# Altium PCB PMP30825_RevA.PcbDoc (part 2 of 3)
Units mil, origin at the board's own origin, x right, y up, seen from the top; angles counter-clockwise.
Board outline 3750 x 1750 mil, 2 copper layers (Top Layer, Bottom Layer), stack 62 mil thick; 85 components, 40 nets, 187 pads, 24 vias.
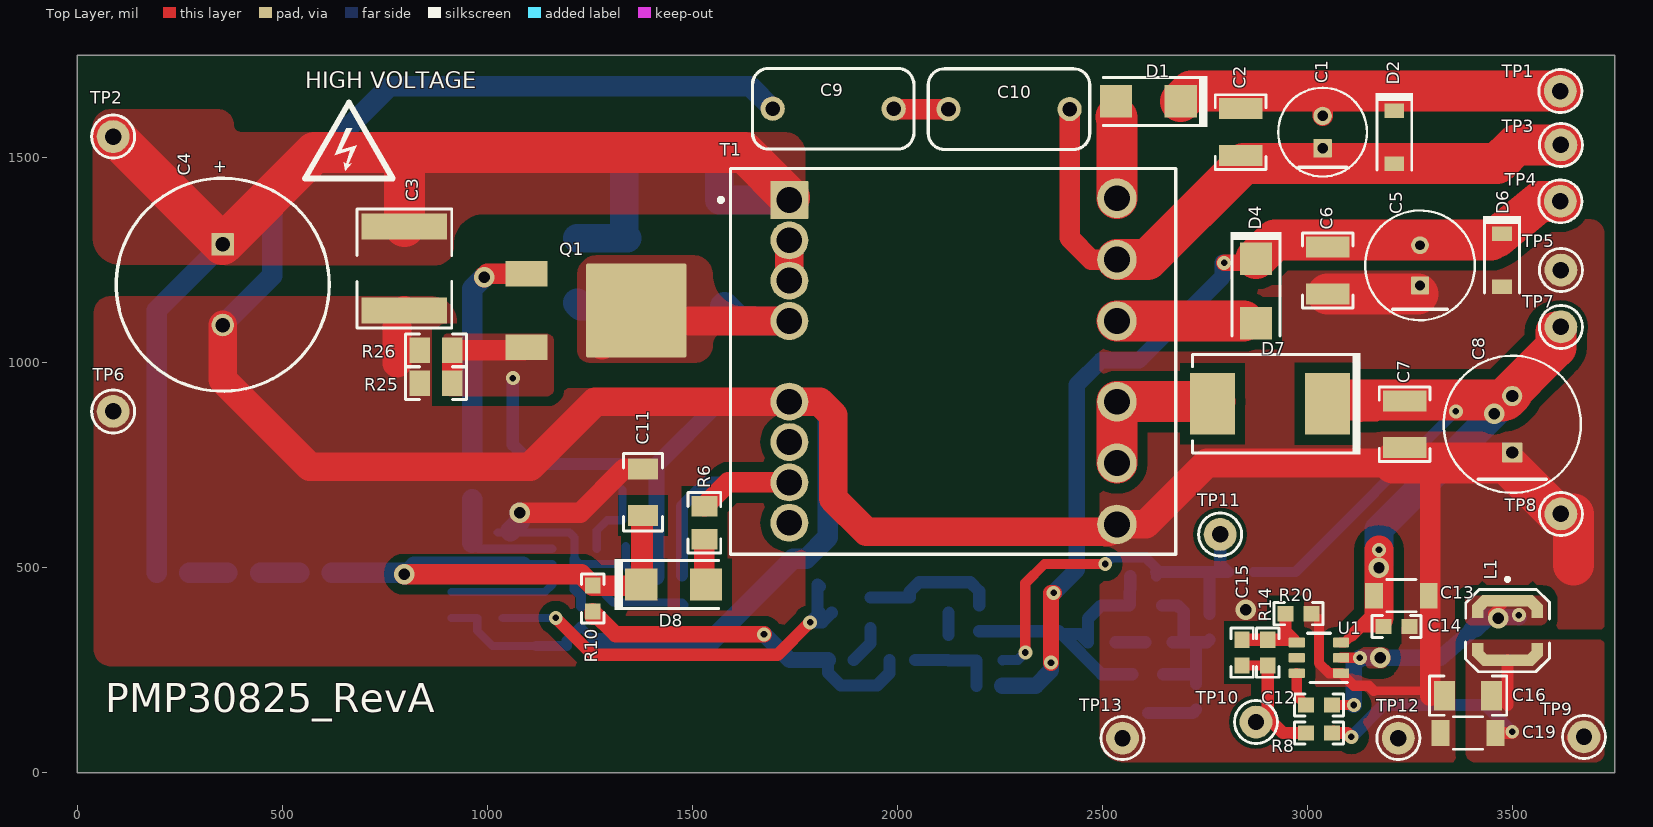
[diagram p0: Top Layer view]

## Part data (continued)
R18: "RES, 169 k, 1%, 0.1 W, 0603", Manufacturer=Vishay-Dale, Power_W=0.1, Supplier Part Number 1=541-169KHCT-ND, TempCo="100 ppm/C", Tolerance_%=1, Value1=1%, Value2=0.1W, Value_Code=169k, AEC Category=Q200, AEC Qualified=?, ComponentLink1Description="Datasheet link", ComponentLink1URL=http://www.vishay.com/docs/20035/dcrcwe3.pdf, CompType=Resistor, EIA_Code=E96, Green_EU RoHS="Passed with Exemption", Green_EU RoHS-2=Passed, Green_Lifecycle=Active, Green_REACh=Passed, LatestRevisionDate=2017-06-13, MountType=SMT, PackageReference=0603, PartNumber=CRCW0603169KFKEA, Published=2008-06-26, Publisher="Texas Instruments", Res_ohm=169000, RoHS=Y, SizeArea_mm2=1.28, SizeX_mm=1.6, SizeY_mm=0.8, SizeZ_mm=1, Supplier 1=Digi-Key, Supplier 2=Newark, Supplier 3=Mouser, Supplier Part Number 2=52K8184, Supplier Part Number 3=71-CRCW0603-169K-E3, SymbolVersion=2009-05-29, Technology="Thick Film", U/M=EA, ValueDisplayed=169k, VDC_V=75
R19: "RES, 0, 5%, 0.125 W, 0805", Manufacturer=Vishay-Dale, Power_W=0.125, Supplier Part Number 1=541-0.0ACT-ND, TempCo="200 ppm/C", Tolerance_%=5, Value1=5%, Value2=0.125W, Value_Code=0000, ValueDisplayed=0, AEC Category=Q200, AEC Qualified=?, ComponentLink1Description="Datasheet link", ComponentLink1URL=http://www.vishay.com/docs/20035/dcrcwe3.pdf, CompType=Resistor, EIA_Code=E24, LatestRevisionDate=2016-08-02, MountType=SMT, PackageReference=0805, PartNumber=CRCW08050000Z0EA, Published=2008-06-26, Publisher="Texas Instruments", Res_ohm=0, RoHS=Y, SizeArea_mm2=2.5, SizeX_mm=2, SizeY_mm=1.25, SizeZ_mm=1.45, Supplier 1=Digi-Key, Supplier 2=Mouser, Supplier 3=Farnell, Supplier Part Number 2=71-CRCW0805-0-E3, Supplier Part Number 3=1469846, SymbolVersion=2009-05-29, Technology="Thick Film", U/M=EA, VDC_V=150
R20: "RES, 13.7 k, 1%, 0.1 W, 0603", Manufacturer=Vishay-Dale, Power_W=0.1, Supplier Part Number 1=541-13.7KHCT-ND, TempCo="100 ppm/C", Tolerance_%=1, Value1=1%, Value2=0.1W, Value_Code=13k7, ValueDisplayed=13.7k, AEC Category=Q200, AEC Qualified=?, ComponentLink1Description="Datasheet link", ComponentLink1URL=http://www.vishay.com/docs/20035/dcrcwe3.pdf, CompType=Resistor, EIA_Code=E96, Green_EU RoHS="Passed with Exemption", Green_EU RoHS-2=Passed, Green_Lifecycle=Active, Green_REACh=Passed, LatestRevisionDate=2017-06-13, MountType=SMT, PackageReference=0603, PartNumber=CRCW060313K7FKEA, Published=2008-06-26, Publisher="Texas Instruments", Res_ohm=13700, RoHS=Y, SizeArea_mm2=1.28, SizeX_mm=1.6, SizeY_mm=0.8, SizeZ_mm=1, Supplier 1=Digi-Key, Supplier 2=Newark, Supplier 3=Mouser, Supplier Part Number 2=42K3706, Supplier Part Number 3=71-CRCW0603-13.7K-E3, SymbolVersion=2009-05-29, Technology="Thick Film", U/M=EA, VDC_V=75
R21: "RES, 22.6 k, 1%, 0.1 W, 0603", Manufacturer=Vishay-Dale, Power_W=0.1, Supplier Part Number 1=541-22.6KHCT-ND, TempCo="100 ppm/C", Tolerance_%=1, Value1=1%, Value2=0.1W, Value_Code=22k6, ValueDisplayed=22.6k, AEC Category=Q200, AEC Qualified=?, ComponentLink1Description="Datasheet link", ComponentLink1URL=http://www.vishay.com/docs/20035/dcrcwe3.pdf, CompType=Resistor, EIA_Code=E96, Green_EU RoHS="Passed with Exemption", Green_EU RoHS-2=Passed, Green_Lifecycle=Active, Green_REACh=Passed, LatestRevisionDate=2017-06-13, MountType=SMT, PackageReference=0603, PartNumber=CRCW060322K6FKEA, Published=2008-06-26, Publisher="Texas Instruments", Res_ohm=22600, RoHS=Y, SizeArea_mm2=1.28, SizeX_mm=1.6, SizeY_mm=0.8, SizeZ_mm=1, Supplier 1=Digi-Key, Supplier 2=Newark, Supplier 3=Mouser, Supplier Part Number 2=52K8290, Supplier Part Number 3=71-CRCW0603-22.6K-E3, SymbolVersion=2009-05-29, Technology="Thick Film", U/M=EA, VDC_V=75
R22: "RES, 1.54 k, 1%, 0.1 W, 0603", Manufacturer=Vishay-Dale, Power_W=0.1, Supplier Part Number 1=541-1.54KHCT-ND, TempCo="100 ppm/C", Tolerance_%=1, Value1=1%, Value2=0.1W, Value_Code=1k54, ValueDisplayed=1.54k, AEC Category=Q200, AEC Qualified=?, ComponentLink1Description="Datasheet link", ComponentLink1URL=http://www.vishay.com/docs/20035/dcrcwe3.pdf, CompType=Resistor, EIA_Code=E96, Green_EU RoHS="Passed with Exemption", Green_EU RoHS-2=Passed, Green_Lifecycle=Active, Green_REACh=Passed, LatestRevisionDate=2017-06-13, MountType=SMT, PackageReference=0603, PartNumber=CRCW06031K54FKEA, Published=2008-06-26, Publisher="Texas Instruments", Res_ohm=1540, RoHS=Y, SizeArea_mm2=1.28, SizeX_mm=1.6, SizeY_mm=0.8, SizeZ_mm=1, Supplier 1=Digi-Key, Supplier 2=Newark, Supplier 3=Mouser, Supplier Part Number 2=52K8038, Supplier Part Number 3=71-CRCW0603-1.54K-E3, SymbolVersion=2009-05-29, Technology="Thick Film", U/M=EA, VDC_V=75
R23: library part Resistor, "RES, xxx ohm, x%, xW, [PackageReference]", Alternate Manufacturer=-, Manufacturer="Used in BOM report", Alternate PartNumber=-, ComponentLink1Description="Datasheet Link", ComponentLink1URL="Paste URL for datasheet here", CompType=Resistor, LatestRevisionDate=2017-05-31, LatestRevisionNote="Added Alternate PartNumber and Alternate Manufacturer parameters to appropriate components.", MountType="SMT or TH (used in PnP report)", PackageReference="Used in PnP output and some BOM reports", PartNumber=DNP, Publisher="Texas Instruments", RoHS="Used in BOM report.  Use Y or N.", SymbolVersion=2009-05-29, U/M=EA
R24: "RES, 4.99 k, 1%, 0.1 W, 0603", Manufacturer=Vishay-Dale, Power_W=0.1, Supplier Part Number 1=541-4.99KHCT-ND, TempCo="100 ppm/C", Tolerance_%=1, Value1=1%, Value2=0.1W, Value_Code=4k99, ValueDisplayed=4.99k, AEC Category=Q200, AEC Qualified=?, ComponentLink1Description="Datasheet link", ComponentLink1URL=http://www.vishay.com/docs/20035/dcrcwe3.pdf, CompType=Resistor, EIA_Code=E96, Green_EU RoHS="Passed with Exemption", Green_EU RoHS-2=Passed, Green_Lifecycle=Active, Green_REACh=Passed, LatestRevisionDate=2017-06-13, MountType=SMT, PackageReference=0603, PartNumber=CRCW06034K99FKEA, Published=2008-06-26, Publisher="Texas Instruments", Res_ohm=4990, RoHS=Y, SizeArea_mm2=1.28, SizeX_mm=1.6, SizeY_mm=0.8, SizeZ_mm=1, Supplier 1=Digi-Key, Supplier 2=Newark, Supplier 3=Mouser, Supplier Part Number 2=52K8500, Supplier Part Number 3=71-CRCW0603-4.99K-E3, SymbolVersion=2009-05-29, Technology="Thick Film", U/M=EA, VDC_V=75
R25: "RES, 4.70, 1%, 0.125 W, 0805", Manufacturer=Panasonic, Power_W=0.125, Supplier Part Number 1=P4.7DCT-ND, TempCo="200 ppm/C", Tolerance_%=1, Value1=1%, Value2=0.125W, Value_Code=4R70, ValueDisplayed=4.70, AEC Category=Q200, AEC Qualified=?, ComponentLink1Description="Datasheet link", ComponentLink1URL=http://www.panasonic.com/industrial/components/pdf/AOA0000CE3.pdf, CompType=Resistor, Green_EU RoHS=Incomplete, Green_EU RoHS-2=Incomplete, Green_Lifecycle="Not Set", Green_REACh=Incomplete, LatestRevisionDate=2017-06-23, MountType=SMT, PackageReference=0805, PartNumber=ERJ-6RQF4R7V, Published=2008-06-26, Publisher="Texas Instruments", Res_ohm=4.7, RoHS=Y, SizeArea_mm2=2.5, SizeX_mm=2, SizeY_mm=1.25, SizeZ_mm=1.45, Supplier 1=Digi-Key, Supplier 2=Mouser, Supplier 3=Farnell, Supplier Part Number 2=667-ERJ-6RQF4R7V, Supplier Part Number 3=1892972, SymbolVersion=2009-05-29, Technology="Thick Film", U/M=EA
R26: "RES, 3.30, 1%, 0.125 W, 0805", Manufacturer=Panasonic, Power_W=0.125, Supplier Part Number 1=P3.3DCT-ND, TempCo="200 ppm/C", Tolerance_%=1, Value1=1%, Value2=0.125W, Value_Code=3R30, ValueDisplayed=3.30, AEC Category=Q200, AEC Qualified=?, ComponentLink1Description="Datasheet link", ComponentLink1URL=http://www.panasonic.com/industrial/components/pdf/AOA0000CE3.pdf, CompType=Resistor, LatestRevisionDate=2017-06-23, MountType=SMT, PackageReference=0805, PartNumber=ERJ-6RQF3R3V, Published=2008-06-26, Publisher="Texas Instruments", Res_ohm=3.3, RoHS=Y, SizeArea_mm2=2.5, SizeX_mm=2, SizeY_mm=1.25, SizeZ_mm=1.45, Supplier 1=Digi-Key, Supplier 2=Mouser, Supplier 3=Farnell, Supplier Part Number 2=667-ERJ-6RQF3R3V, Supplier Part Number 3=1717805, SymbolVersion=2009-05-29, Technology="Thick Film", U/M=EA
R27: "RES, 32.4 k, 1%, 0.1 W, 0603", Manufacturer=Vishay-Dale, Power_W=0.1, Supplier Part Number 1=541-32.4KHCT-ND, TempCo="100 ppm/C", Tolerance_%=1, Value1=1%, Value2=0.1W, Value_Code=32k4, ValueDisplayed=32.4k, AEC Category=Q200, AEC Qualified=?, ComponentLink1Description="Datasheet link", ComponentLink1URL=http://www.vishay.com/docs/20035/dcrcwe3.pdf, CompType=Resistor, EIA_Code=E96, Green_EU RoHS="Passed with Exemption", Green_EU RoHS-2=Passed, Green_Lifecycle=Active, Green_REACh=Passed, LatestRevisionDate=2017-06-13, MountType=SMT, PackageReference=0603, PartNumber=CRCW060332K4FKEA, Published=2008-06-26, Publisher="Texas Instruments", Res_ohm=32400, RoHS=Y, SizeArea_mm2=1.28, SizeX_mm=1.6, SizeY_mm=0.8, SizeZ_mm=1, Supplier 1=Digi-Key, Supplier 2=Newark, Supplier 3=Mouser, Supplier Part Number 2=52K8423, Supplier Part Number 3=71-CRCW0603-32.4K-E3, SymbolVersion=2009-05-29, Technology="Thick Film", U/M=EA, VDC_V=75
R28: "RES, 44.2 k, 1%, 0.1 W, 0603", Manufacturer=Vishay-Dale, Power_W=0.1, Supplier Part Number 1=541-44.2KHCT-ND, TempCo="100 ppm/C", Tolerance_%=1, Value1=1%, Value2=0.1W, Value_Code=44k2, ValueDisplayed=44.2k, AEC Category=Q200, AEC Qualified=?, ComponentLink1Description="Datasheet link", ComponentLink1URL=http://www.vishay.com/docs/20035/dcrcwe3.pdf, CompType=Resistor, EIA_Code=E96, Green_EU RoHS="Passed with Exemption", Green_EU RoHS-2=Passed, Green_Lifecycle=Active, Green_REACh=Passed, LatestRevisionDate=2017-06-13, MountType=SMT, PackageReference=0603, PartNumber=CRCW060344K2FKEA, Published=2008-06-26, Publisher="Texas Instruments", Res_ohm=44200, RoHS=Y, SizeArea_mm2=1.28, SizeX_mm=1.6, SizeY_mm=0.8, SizeZ_mm=1, Supplier 1=Digi-Key, Supplier 2=Newark, Supplier 3=Mouser, Supplier Part Number 2=52K8533, Supplier Part Number 3=71-CRCW0603-44.2K-E3, SymbolVersion=2009-05-29, Technology="Thick Film", U/M=EA, VDC_V=75
R30: "RES, 4.02 k, 1%, 0.1 W, 0603", Manufacturer=Vishay-Dale, Power_W=0.1, Supplier Part Number 1=541-4.02KHCT-ND, TempCo="100 ppm/C", Tolerance_%=1, Value1=1%, Value2=0.1W, Value_Code=4k02, ValueDisplayed=4.02k, AEC Category=Q200, AEC Qualified=?, ComponentLink1Description="Datasheet link", ComponentLink1URL=http://www.vishay.com/docs/20035/dcrcwe3.pdf, CompType=Resistor, EIA_Code=E96, Green_EU RoHS="Passed with Exemption", Green_EU RoHS-2=Passed, Green_Lifecycle=Active, Green_REACh=Passed, LatestRevisionDate=2017-06-13, MountType=SMT, PackageReference=0603, PartNumber=CRCW06034K02FKEA, Published=2008-06-26, Publisher="Texas Instruments", Res_ohm=4020, RoHS=Y, SizeArea_mm2=1.28, SizeX_mm=1.6, SizeY_mm=0.8, SizeZ_mm=1, Supplier 1=Digi-Key, Supplier 2=Newark, Supplier 3=Mouser, Supplier Part Number 2=52K8483, Supplier Part Number 3=71-CRCW0603-4.02K-E3, SymbolVersion=2009-05-29, Technology="Thick Film", U/M=EA, VDC_V=75
T1: library part CMP-0088528-1, "TRANSFORMER", Frequency_Fixed=80kHz, Manufacturer="Wurth Electronics", Operating Temperature Range="-40°C to +125°C", Voltage_Isolation_Vrms=3kV, AEC Qualified=No, Datasheet Path=datasheets/Trans-750319024r00.pdf, DCR_ohm=6.32, helpURL=https://upverter.com/upn/revision/be9802b5c4ace36f/, Ind_H=2mH, Lead Free=Yes, Ns1toNp=1:1/5.67:1/6.8:1/8.1:1/10:1, PackageReference=PTH_TRANSFORMER, Part Number=750319024r00, RoHS=TRUE, Rsec1_ohm=0.094, SizeZ_mm=25.2mm
TP1 TP2 TP4 TP7 TP9 TP10: "Test Point, Miniature, Red, TH", Color=Red, Manufacturer=Keystone, Supplier Part Number 1=36-5000-ND, ComponentLink1Description="Datasheet URL", ComponentLink1URL=http://www.keyelco.com/userAssets/file/M60-2p60.pdf, CompType="Test Point Loop", ContactFinish=Silver, Green_EU RoHS=Passed, Green_EU RoHS-2=Incomplete, Green_Lifecycle=Active, Green_REACh=Passed, LatestRevisionDate=2017-05-11, MountType=TH, PackageReference="Red Miniature Testpoint", PartNumber=5000, Publisher="Texas Instruments", RoHS=Y, Supplier 1=Digi-Key, Supplier 2=Mouser, Supplier Part Number 2=534-5000, SymbolVersion=2008-04-04
TP3 TP5 TP6 TP8 TP12: "Test Point, Miniature, Black, TH", Color=Black, Manufacturer=Keystone, Supplier Part Number 1=36-5001-ND, ComponentLink1Description="Datasheet URL", ComponentLink1URL=http://www.keyelco.com/userAssets/file/M60-2p60.pdf, CompType="Test Point Loop", ContactFinish=Silver, Green_EU RoHS=Passed, Green_EU RoHS-2=Incomplete, Green_Lifecycle=Active, Green_REACh=Passed, LatestRevisionDate=2017-05-11, MountType=TH, PackageReference="Black Miniature Testpoint", PartNumber=5001, Publisher="Texas Instruments", RoHS=Y, Supplier 1=Digi-Key, Supplier 2=Mouser, Supplier Part Number 2=534-5001, SymbolVersion=2008-04-04
TP11: "Test Point, Miniature, Red, TH", Manufacturer=Keystone, Supplier Part Number 1=5000K-ND, ComponentLink1Description="Datasheet Link", ComponentLink1URL=http://www.keyelco.com/userAssets/file/M60-2p60.pdf, CompType="Test Point Loop", LatestRevisionDate=2014-11-26, MountType=TH, PackageReference="Red Miniature Testpoint", PartNumber=5000, Publisher="Texas Instruments", RoHS=Y, Supplier 1=Digi-Key, SymbolVersion=2008-04-04, U/M=EA
TP13: "Test Point, Miniature, Black, TH", Manufacturer=Keystone, Supplier Part Number 1=5001K-ND, ComponentLink1Description="Datasheet Link", ComponentLink1URL=http://www.keyelco.com/userAssets/file/M60-2p60.pdf, CompType="Test Point Loop", LatestRevisionDate=2014-11-26, MountType=TH, PackageReference="Black Miniature Testpoint", PartNumber=5001, Publisher="Texas Instruments", RoHS=Y, Supplier 1=Digi-Key, SymbolVersion=2008-04-04, U/M=EA
U1: library part CMP-0073969-3, "4.5V to 28V Input, 2A Output, EMI Friendly Synchronous Step-Down Converter, DDC0006A (SOT-23-THIN-6)", Alternate Manufacturer="Texas Instruments", Alternate PartNumber=TPS54202DDCT, Operating Temperature Range="-40 to 125 C", Rating=Catalog, AEC Category=Q200, AEC Qualified=N, ComponentLink1Description="Datasheet Link", ComponentLink1URL=http://www.ti.com/lit/ds/symlink/tps54202.pdf, ComponentLink2Description="Product Folder", ComponentLink2URL=http://www.ti.com/product/tps54202, ComponentLink3Description="Online Datasheet", ComponentLink3URL=http://www.ti.com/product/tps54202/datasheet, CompType=IC, Manufacturer="Texas Instruments", MountType=SMT, PackageDescription=SOT-23-THIN-6, PackageReference=DDC0006A, PartNumber=TPS54202DDCR, RoHS=Y, SizeArea_mm2=4.8675, SizeAreaWB_mm2=10.4675, SizeX_mm=1.65, SizeY_mm=2.95, SizeZ_mm=0.87